# Altium PCB Roverbreakout3.PcbDoc
Units mil, origin at the board's own origin, x right, y up, seen from the top; angles counter-clockwise.
Board outline 1968.5 x 1970 mil, 2 copper layers (Top Layer, Bottom Layer); 29 components, 22 nets, 159 pads, 41 vias.
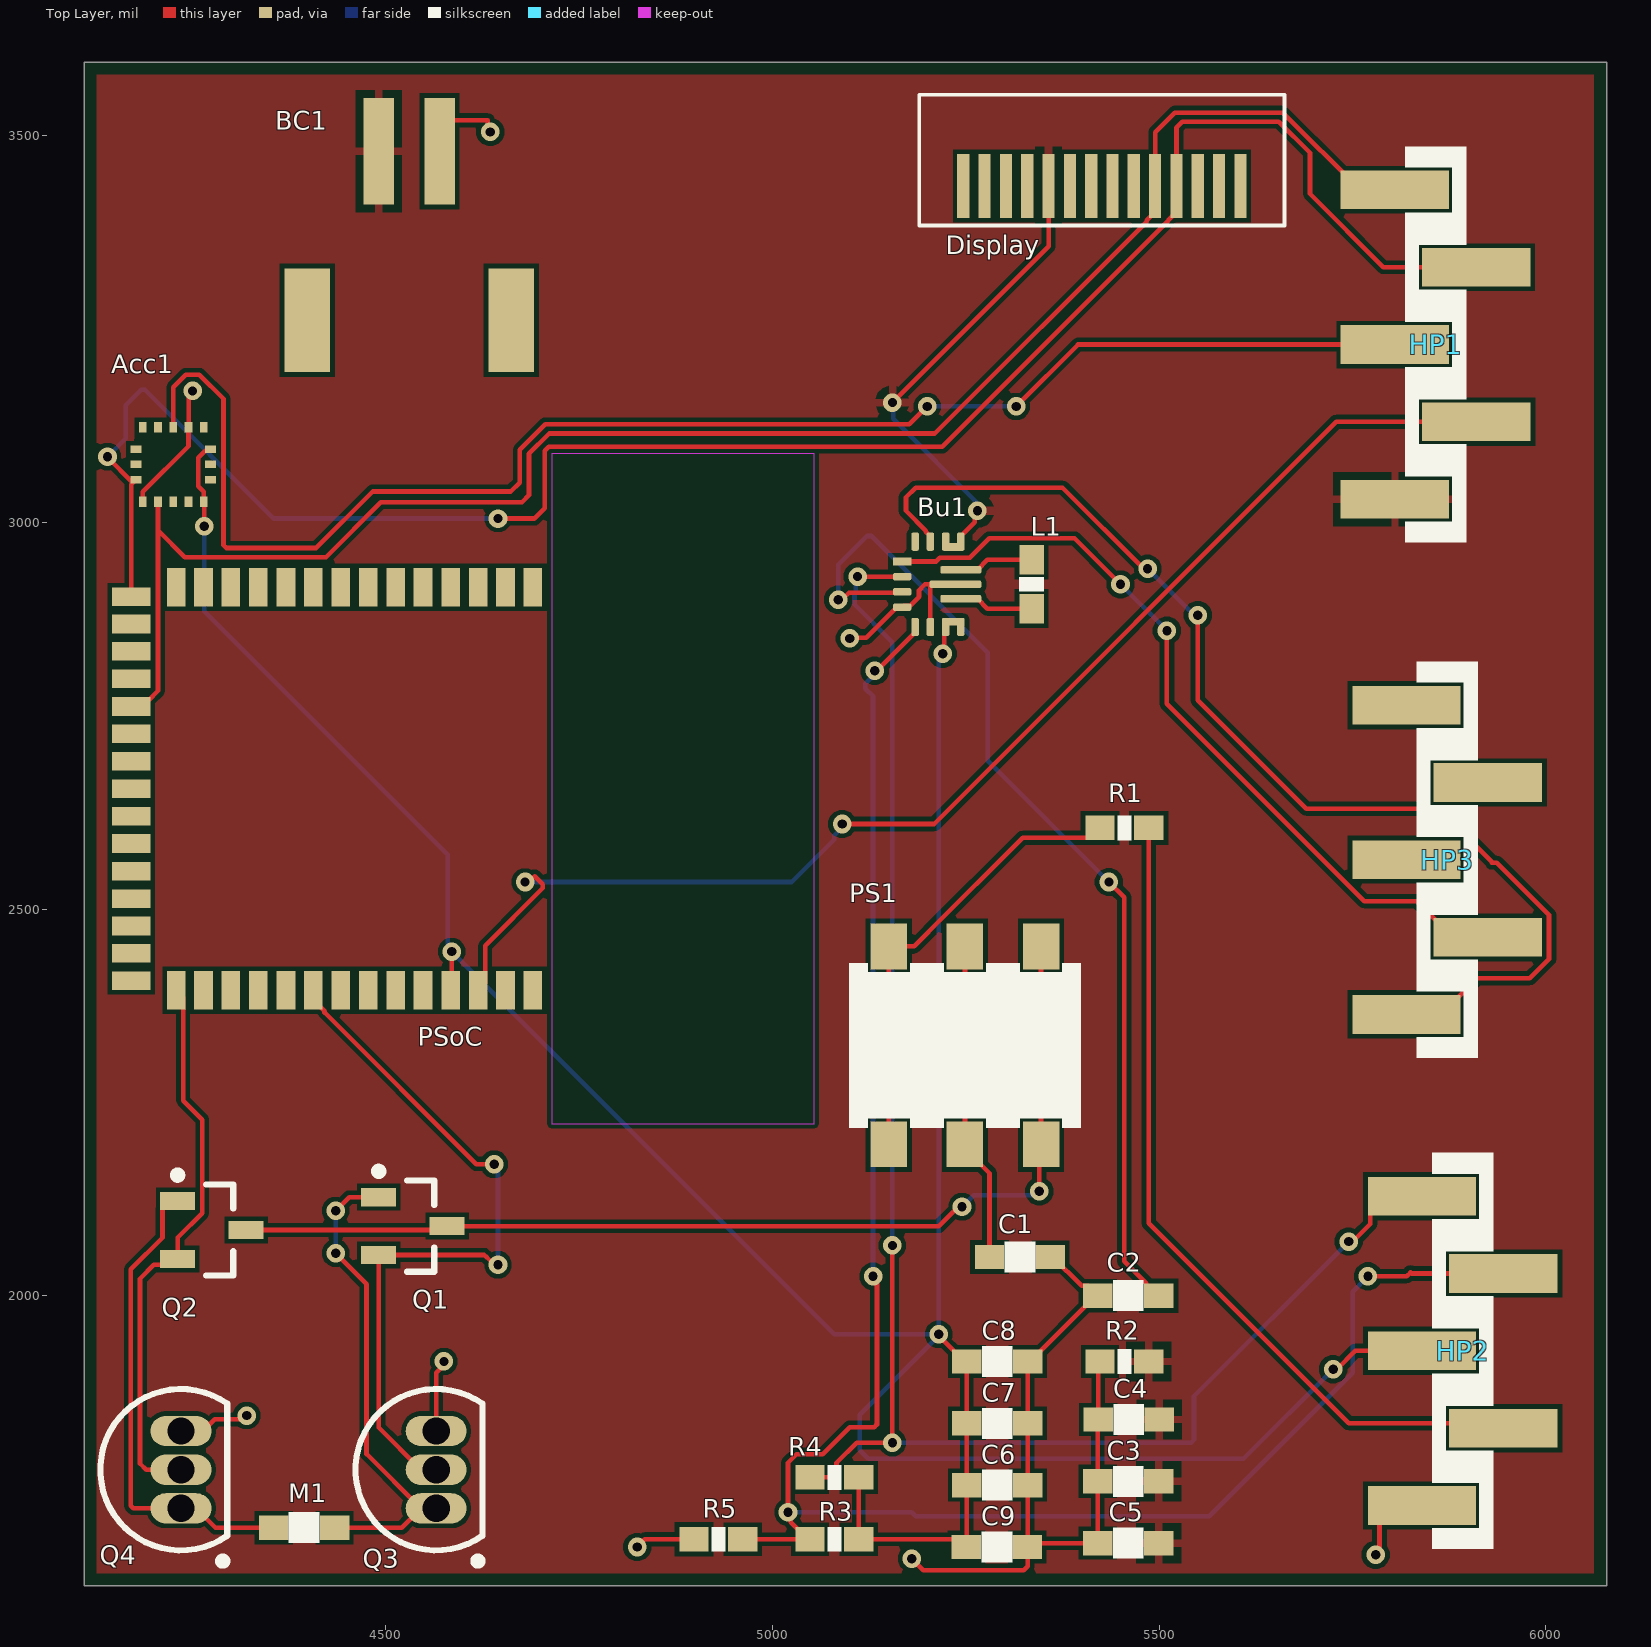
[diagram p0: Top Layer view]
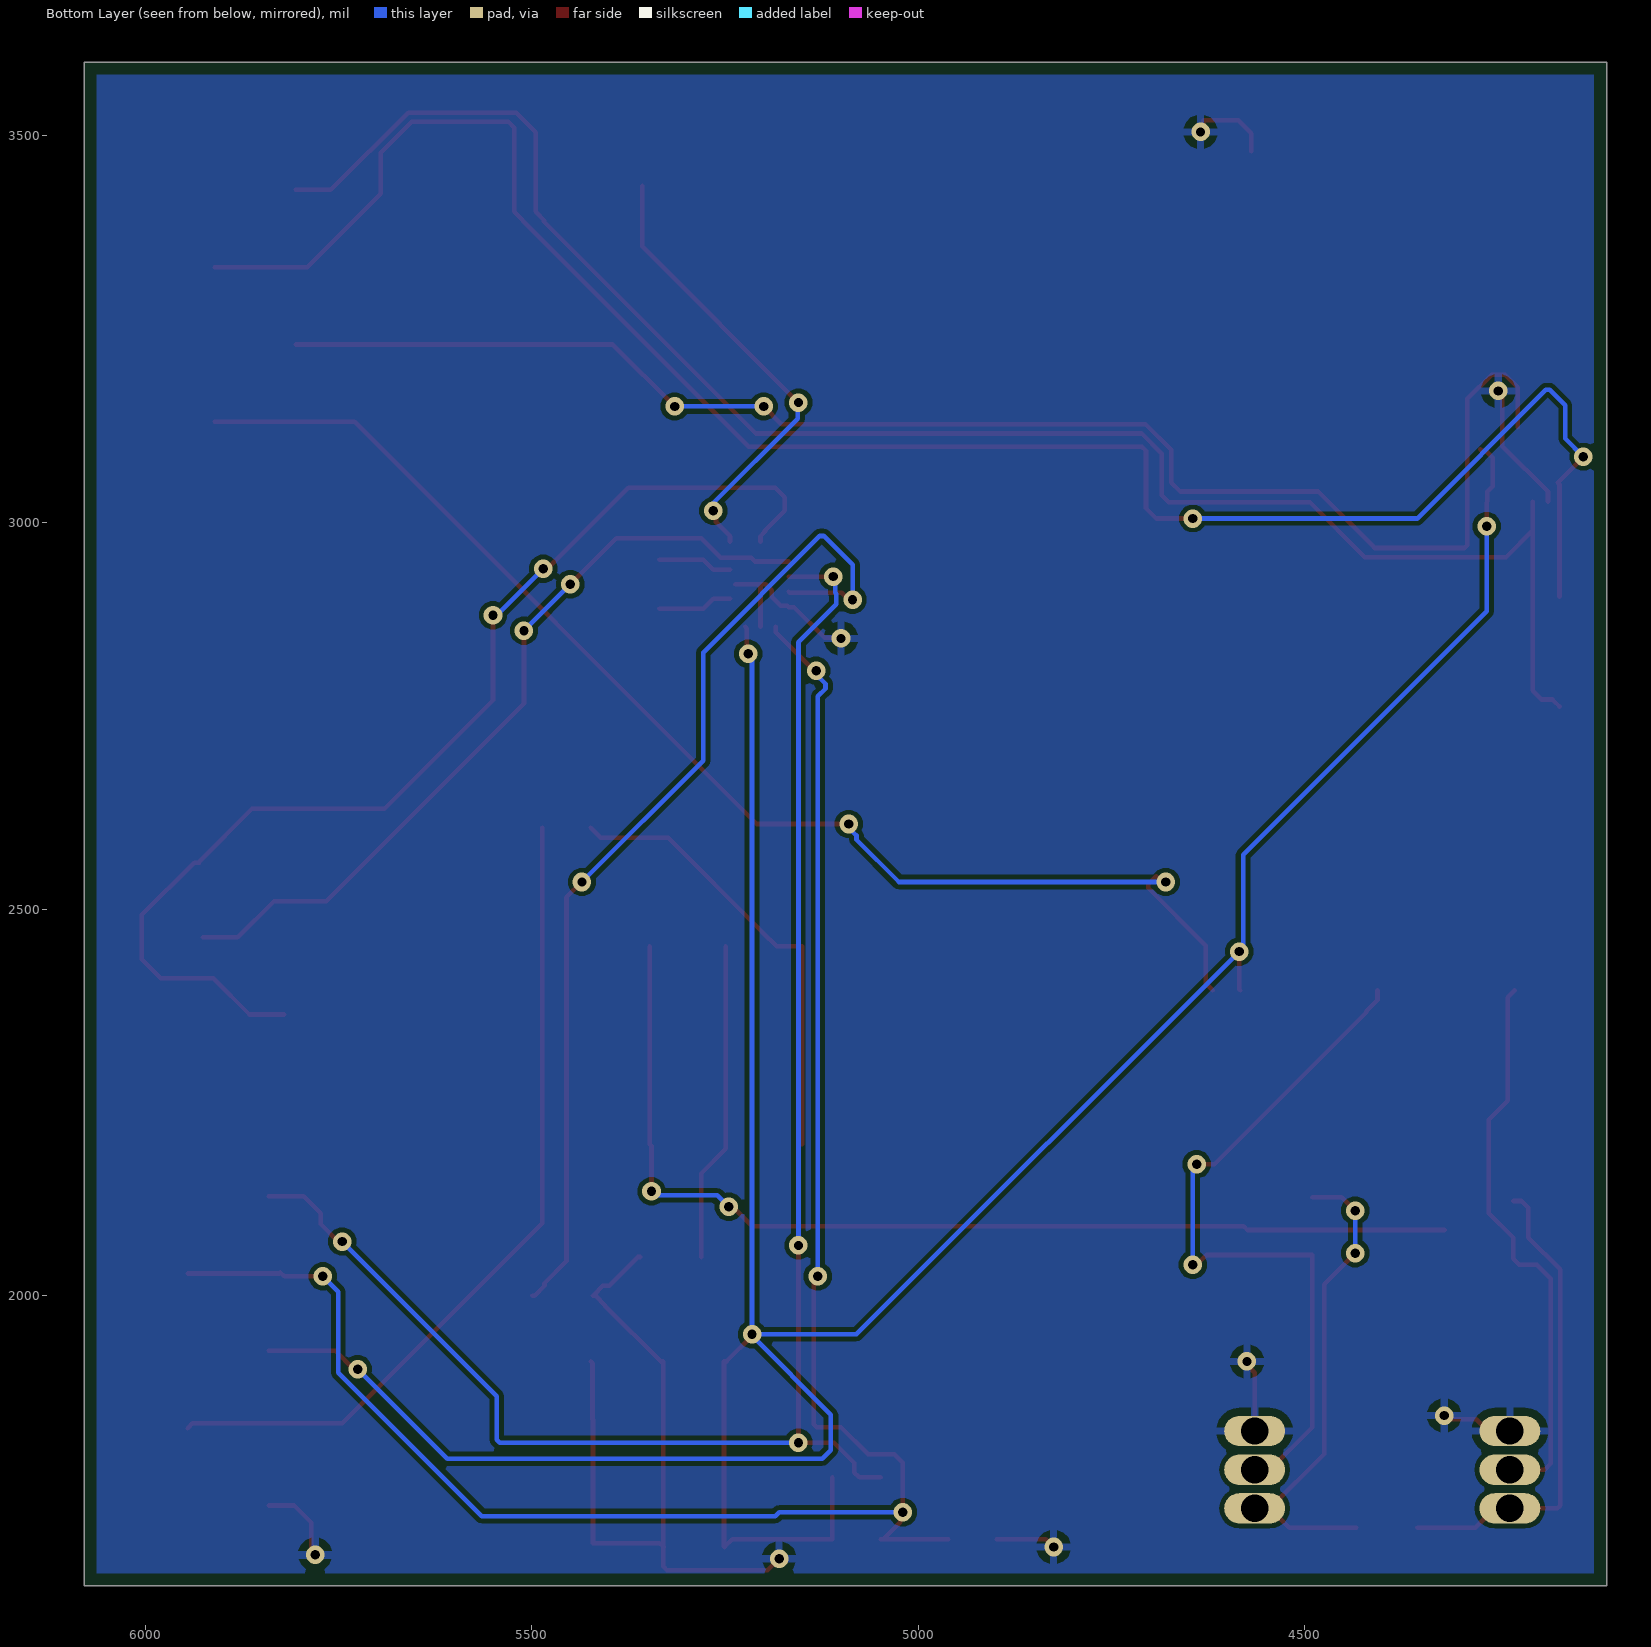
[diagram p1: Bottom Layer view, seen from below]

## Layer stack, top to bottom
Top Solder: solder mask 0.4, Solder Resist, Dk 3.5
Top Layer: signal copper 1.4
Dielectric 1: dielectric 12.6, FR-4, Dk 4.8
Bottom Layer: signal copper 1.4
Bottom Solder: solder mask 0.4, Solder Resist, Dk 3.5

## Board outline
4110,1625 4110,3595 6078.5,3595 6078.5,1625

## Design rules (kind name [scope] priority, off if disabled: settings)
BoardOutlineClearance [All] p1: gap=16 ignorepadtopadclearanceinfootprint=FALSE except(0: Arc-SplitContinuation Track-SplitContinuation SMDPad-SplitContinuation THPad-SplitContinuation Via-SplitContinuation Fill-SplitContinuation Poly-SplitContinuation Region-SplitContinuation Text-SplitContinuation)
Clearance [All] p1: gap=6 ignorepadtopadclearanceinfootprint=FALSE
HoleSize [All] p1: absolutevalues=TRUE maxlimit=245 minlimit=12 maxpercent=80.000 minpercent=20.000
MinimumSolderMaskSliver [All] p1 off: minsoldermaskwidth=10
NetAntennae [All] p1 off: netantennaetolerance=0
PolygonConnect [All] p1: connectstyle=Relief reliefconductorwidth=10 reliefentries=4 polygonreliefangle="90 Angle" airgapwidth=10
RoutingVias [All] p1: holewidth=12 width=24 viastyle="Through Hole" minholewidth=6 minwidth=12 maxholewidth=23.62 maxwidth=47.24
SilkToSilkClearance [All] p1 off: silktosilkclearance=10
SilkToSolderMaskClearance [IsPad] p1 off: minsilkscreentomaskgap=10 clearancetoexposedcopper=TRUE
SolderMaskExpansion [All] p1: expansion=4 istentingtop=FALSE
Width [All] p1: maxlimit=78.74 minlimit=6 preferedwidth=6 minimp=50.000000 maximp=50.000000 favimp=50.000000
25 further rules are at their usual default settings.

## Components (designator, comment, footprint, x,y, rotation, side; value= is the part's Value field where it differs from the comment)
Acc1 "LIS3DH" LIS3DH 4225,3075 r270 top
BC1 "BatteryConnector" BatteryConnector 4530,3480 r0 top
Bu1 "Buck_Boost_Converter" Buck_Boost_Converter 5210,2920 r0 top
C1 "Capacitor1" PASSIVE-CAPACITOR-0603 5320,2050 r180 top value=1F
C2 "Capacitor1" PASSIVE-CAPACITOR-0603 5460,2000 r0 top value=?
C3 "Capacitor1" PASSIVE-CAPACITOR-0603 5460,1760 r0 top value=10uF
C4 "Capacitor1" PASSIVE-CAPACITOR-0603 5460.63,1840 r0 top value=10uF
C5 "Capacitor1" PASSIVE-CAPACITOR-0603 5460,1680 r0 top value=10uF
C6 "Capacitor1" PASSIVE-CAPACITOR-0603 5290.63,1755 r180 top value=10uF
C7 "Capacitor1" PASSIVE-CAPACITOR-0603 5290.63,1835 r180 top value=22uF
C8 "Capacitor1" PASSIVE-CAPACITOR-0603 5290.63,1915 r180 top value=22uF
C9 "Capacitor1" PASSIVE-CAPACITOR-0603 5290,1675 r180 top value=22uF
Display "Display" Display 5424.65,3452.44 r0 top (schematic designator Dis1)
HP1 "Header-Pin" Header_Pin 5855.03,3231.31 r90 top
HP2 "Header-Pin" Header_Pin 5890,1930 r90 top
HP3 "Header-Pin" Header_Pin 5870,2565 r90 top
L1 "Inductor" PASSIVE-INDUCTOR-0603 5335,2920 r270 top value=1.5uH
M1 "Motor" Motor 54079.41,-8252.76 r0 top
PS1 "Switch" "3-Way Switch" 5230,2380 r0 top
PSoC "PSoC 63 BLE" "PSoC-63 BLE" 4884.21,2380.04 r270 top (schematic designator PC1)
Q1 "PNP" SOT-23B_N 4535,2090 r0 top
Q2 "PNP" SOT-23B_N 4275,2085 r0 top
Q3 "NPN" TO-226-AA 4565,1775 r0 top
Q4 "NPN" TO-226-AA 4235,1775 r0 top
R1 "Resistor" PASSIVE-RESISTOR-0603 5455,2605 r180 top value=2.5
R2 "Resistor" PASSIVE-RESISTOR-0603 5455,1915 r180 top value=10k
R3 "Resistor" PASSIVE-RESISTOR-0603 5080,1685 r180 top value=470K
R4 "Resistor" PASSIVE-RESISTOR-0603 5080,1765 r180 top value=100k
R5 "Resistor" PASSIVE-RESISTOR-0603 4930,1685 r180 top value=150K

## Footprints (in the part's own frame and the unit in brackets; to place one, negate y for a bottom-side part, rotate by r counter-clockwise, add the part's x,y. Pads: shape width x height; smd on the part's side, far side on the other; paste and mask are expansions set on the pad)
"3-Way Switch" [mm]
  rect 1.2x1.5 smd: 1(-2.022,-4.679) 1(-2.022,1.821) 2(0.478,-4.679) 2(0.478,1.821) 3(2.978,-4.679) 3(2.978,1.821)
  silkscreen extent -3.32,-4.13 4.28,1.27, body extent -3.4,-5.23 4.3,2.27, height 3.3
BatteryConnector [mm]
  rect 1x3.5 smd: GND(1,0) VBAT(-1,0)
  rect 1.5x3.4 smd: ""(-3.35,-5.55) ""(3.35,-5.55)
  body extent -3.95,-6 3.95,0, height 5.5
Buck_Boost_Converter [mm] "Buck Boost Converter"
  rrect50% 0.25x0.6 smd: EN(-0.15,1.4) FB(-0.65,-1.4) FB2(-0.15,-1.4) VIN(0.35,1.4) VIN(0.85,1.4) VOUT(0.35,-1.4) VOUT(0.85,-1.4) VSEL(-0.65,1.4)
  rrect50% 0.6x0.25 smd: GND(-1.075,-0.75) PG(-1.075,0.25) VAUX(-1.075,-0.25)
  rrect50% 1.35x0.25 smd: L1(0.85,0.475) L2(0.85,-0.475)
  rrect50% 1.7x0.25 smd: PGND(0.675,0)
  rect 0.6x0.25 smd: PS/S(-1.075,0.75)
  rrect50% 0.75x0.25 smd: VIN(0.6,1.225) VOUT(0.6,-1.225)
  body extent -1.07,-1.43 1.28,1.4, height 0.4
Display [mm]
  rect 0.4x2.1 smd: 1(-4.519,-0.443) 2(-3.819,-0.443) 3(-3.119,-0.443) 4(-2.419,-0.443) 5(-1.719,-0.443) 6(-1.019,-0.443) 7(-0.319,-0.443) 8(0.381,-0.443) 9(1.081,-0.443) 10(1.781,-0.443) 11(2.481,-0.443) 12(3.181,-0.443) 13(3.881,-0.443) 14(4.581,-0.443)
  silkscreen extent -5.97,-1.74 6.03,2.56
Header_Pin [mm]
  rect 1.27x3.56 smd: 1(-5.113,1.274) 2(-2.573,-1.396) 3(-0.033,1.274) 4(2.507,-1.396) 5(5.047,1.274)
  silkscreen extent -6.53,-1.06 6.47,0.94, body extent -6.1,-2.62 6.19,2.26, height 9.78
LIS3DH [mm]
  rect 0.25x0.35 smd: ADC1(0.5,1.225) ADC2(0,1.225) CS(-0.5,-1.225) SDA/SDI/SDO(0.5,-1.225) "SDO / SA0"(0,-1.225) VDD(-0.5,1.225)
  rect 0.35x0.25 smd: ADC3(-1.225,1) GND(-1.225,0.5) GND(1.225,-1) INT1(-1.225,0) INT2(-1.225,-1) NC(1.225,0.5) NC(1.225,0) RES(-1.225,-0.5) "SCL / SPC"(1.225,-0.5) VDDIO(1.225,1)
  body extent -1.5,-1.5 1.5,1.5, height 1
Motor [mm]
  rect 0.965x0.8 smd: 1(-1263,252.8) 2(-1261,252.8)
  silkscreen extent -1262.5,252.3 -1261.5,253.3
PASSIVE-CAPACITOR-0603 [mm]
  rect 0.965x0.8 smd: 1(-1,0) 2(1,0)
  silkscreen extent -0.5,-0.5 0.5,0.5
PASSIVE-INDUCTOR-0603 [mm] "Inductor"
  rect 0.965x0.8 smd: 1(-0.8,0) 2(0.8,0)
  silkscreen extent -0.23,-0.4 0.23,0.4, body extent -0.82,-0.4 0.8,0.4, height 0.4
PASSIVE-RESISTOR-0603 [mm]
  rect 0.965x0.8 smd: 1(-0.8,0) 2(0.8,0)
  silkscreen extent -0.23,-0.4 0.23,0.4, body extent -0.82,-0.4 0.8,0.4, height 0.4
"PSoC-63 BLE" [mm]
  rect 1.27x0.61 smd: 1(-0.38,-4.93) 2(-0.38,-5.83) 3(-0.38,-6.73) 4(-0.38,-7.63) 5(-0.38,-8.54) 6(-0.38,-9.44) 7(-0.38,-10.34) 8(-0.38,-11.24) 9(-0.38,-12.14) 10(-0.38,-13.04) 11(-0.38,-13.95) 12(-0.38,-14.85) 13(-0.38,-15.75) 14(-0.38,-16.65) 30(-13.62,-16.65) 31(-13.62,-15.75) 32(-13.62,-14.85) 33(-13.62,-13.95) 34(-13.62,-13.04) 35(-13.62,-12.14) 36(-13.62,-11.24) 37(-13.62,-10.34) 38(-13.62,-9.44) 39(-13.62,-8.54) 40(-13.62,-7.63) 41(-13.62,-6.73) 42(-13.62,-5.83) 43(-13.62,-4.93)
  rect 0.61x1.27 smd: 15(-0.69,-18.12) 16(-1.59,-18.12) 17(-2.49,-18.12) 18(-3.39,-18.12) 19(-4.29,-18.12) 20(-5.2,-18.12) 21(-6.1,-18.12) 22(-7,-18.12) 23(-7.9,-18.12) 24(-8.8,-18.12) 25(-9.7,-18.12) 26(-10.61,-18.12) 27(-11.51,-18.12) 28(-12.41,-18.12) 29(-13.31,-18.12)
  Top Layer keep-out region: -18,-4.31 4,-4.31 4,4.31 -18,4.31
  body extent -14,-18.5 0,0, height 1.2
SOT-23B_N [mm] "SOT23, 3-Leads, Body 2.9x1.3mm, Pitch 0.95mm, Lead Span 2.4mm, IPC Medium Density"
  rect 1.15x0.6 smd: 1(-1.125,0.95) 2(-1.125,-0.95) 3(1.125,0)
  silkscreen extent -1.25,-1.5 0.7,1.92, body extent -0.7,-1.5 0.7,1.5, height 1.14
TO-226-AA [mm] "TO, Flat Index; 3 In-Line, Axial Leads; Body Dia. 4.8mm; Leads 0.55 x 0.51 mm (max)"
  oval 2x1 hole 0.9: 1(0,-1.27) 2(0,0) 3(0,1.27)
  silkscreen extent -2.65,-3.13 1.52,2.65, body extent -2.65,-2.66 1.52,2.66, height 5.33

## Part data
Q1 Q2: "PNP Bipolar Transistor", LatestRevisionDate=29-May-2009, LatestRevisionNote="IPC-7351 Footprint Added.", PackageDescription="3-Pin SOT-23 Package 0.95 mm Pitch, 2.4 mm Lead Span", PackageReference=SOT-23B, PackageVersion=Aug-1999, Published=8-Jun-2000, Publisher="Altium Limited"
Q3 Q4: "NPN Bipolar Transistor", Code_JEDEC=TO-226-AA, LatestRevisionDate=17-Jul-2002, LatestRevisionNote="Re-released for DXP Platform.", PackageDescription="TO, Flat Index; 3 In-Line, Axial Leads; Body Dia. 4.8mm; Leads 0.55 x 0.51 mm (max)", PackageReference=TO-226-AA, Published=8-Jun-2000, Publisher="Altium Limited"
R1 R2 R3 R4 R5: library part Resistor1

## Via types
v1: diameter 24, hole 12, Top Layer to Bottom Layer, 41 vias

## Nets (pads, with @x,y where several pads share a name; then routed paths per layer and width w, separated by ;. In a path a pad name is that pad's centre, name@x,y a point inside that pad or via, vN(x,y) a via of type N, cw(c..) or ccw(c..) an arc to the next point about the centre after c; other vN are vias at no path point)
EN: Bu1.EN HP3.1 | length 1472.4
  Top Layer w6: Bu1.EN 5204.09,2982.01 5198.33,2987.77 5198.33,2989.22 5172.55,3015 5172.55,3032.55 5185,3045 5375,3045 5480,2940 v1(5485,2940) ; v1(5550,2880) 5550,2770 5690.31,2629.69 5861.66,2629.69 5930,2561.35 5930,2560 5936.47,2560 6004.05,2492.42 6004.05,2434.97 5979.41,2410.33 5911.57,2410.33 5864.93,2363.69 HP3.1
  Bottom Layer w6: v1(5485,2940) 5540,2885 5540.13,2885 5545.13,2880 v1(5550,2880)
FB: Bu1.FB HP2.4 R3.2 R5.1 | length 2517.9
  Top Layer w6: R5.1 R3.2@5045.26,1685 ; R3.2 R3.2@5045.26,1685 ; v1(5130,2025) 5131.49,2025 5135,2021.49 5135,1833.51 5131.49,1830 5100,1830 5065,1795 5031.03,1795 5020,1783.97 v1(5020,1720) 5023.44,1716.56 5023.44,1706.81 R3.2@5045.26,1685 ; v1(5132.15,2808.15) 5134.57,2808.15 5184.41,2857.99 Bu1.FB ; v1(5770,2025) 5820,2025 5825,2030 5826.31,2028.69 HP2.4
  Bottom Layer w6: v1(5020,1720) 5180,1720 5185,1715 5564.7,1715 5750.13,1900.43 5750.13,2005.13 v1(5770,2025) ; v1(5130,2025) 5130,2775 5120,2785 5120,2791.13 5132.15,2803.28 v1(5132.15,2808.15)
GND: Acc1.GND BC1.GND Bu1.FB2 Bu1.GND Bu1.PGND C1.1 C2.1 C3.1 C4.1 C5.1 C6.1 C7.1 C8.1 C9.1 HP2.1 Q3.3 Q4.3 R2.2 R5.2 | length 1841.5
  Top Layer w6: Acc1.GND@4185.63,3026.77 4185.63,3039.63 4244.69,3098.69 4244.69,3123.23 4245,3123.54 4245,3166.49 4248.51,3170 v1(4250,3170) ; Q4.3 4263.71,1825 4278.71,1840 4316.49,1840 4320,1843.51 v1(4320,1845) ; Q3.3 4565,1900.13 4575,1910.13 v1(4575,1915) ; BC1.GND 4569.37,3503.31 4586.06,3520 4631.49,3520 4631.56,3519.93 4631.56,3508.44 v1(4635,3505) ; v1(4825,1675) 4835,1685 R5.2 ; v1(5100,2850) 5100.69,2850.69 5121,2850.69 5160.79,2890.47 Bu1.GND 5169.6,2892.39 5177.93,2892.39 5189.49,2903.95 5189.49,2912.28 5197.2,2920 Bu1.PGND@5208.03,2920 ; v1(5180,1660) 5195,1645 5325,1645 5330,1650 C9.1@5330,1675.63 ; Bu1.FB2 5204.09,2916.06 Bu1.PGND@5208.03,2920 ; Bu1.PGND Bu1.PGND@5208.03,2920 ; C9.1 C9.1@5330,1675.63 ; C1.1 5362.62,2050 5399.87,2012.75 5407.88,2012.75 C2.1 5417.38,2000 5404.63,1987.25 5404.63,1986.39 5333.25,1915 C8.1 C7.1 C6.1 C9.1@5330,1675.63 ; R2.2 5421.26,1912.76 C4.1 5420.63,1839.37 C3.1 C5.1 5334.37,1680 C9.1@5330,1675.63 ; v1(5780,1665) 5780,1669.87 5785,1674.87 5785,1706.69 5807,1728.69 HP2.1
INT1: Acc1.INT1 HP1.3 | length 1975.4
  Top Layer w6: Acc1.INT1 4225,3174.7 4241.3,3191 4258.7,3191 4290,3159.7 4290,2970.51 4293.51,2967 4410,2967 4483,3040 4661.49,3040 4673,3051.51 4673,3093.84 4706.16,3127 5177,3127 v1(5200,3150) ; v1(5315,3150) 5395,3230 HP1.3
  Bottom Layer w6: v1(5200,3150) v1(5315,3150)
NetBu1_L1: Bu1.L1 L1.1 | length 96.8
  Top Layer w6: Bu1.L1 5265.12,2938.7 5277.91,2951.5 L1.1
NetBu1_L2: Bu1.L2 L1.2 | length 96.8
  Top Layer w6: Bu1.L2 5265.12,2901.3 5277.91,2888.5 L1.2
NetBu1_VAUX: Bu1.VAUX C2.2 | length 1328.4
  Top Layer w6: v1(5085,2900) 5089.87,2900 5098.87,2909 5166.52,2909 Bu1.VAUX ; v1(5435,2535) 5455,2515 5455,2044.37 5483.37,2016 5483.37,2012.75 5496.12,2000 C2.2
  Bottom Layer w6: v1(5085,2900) 5085,2945 5122.51,2982.51 5127.49,2982.51 5278.28,2831.72 5278.28,2691.72 v1(5435,2535)
NetC1_2: C1.2 PS1.2 | length 414.9
  Top Layer w6: PS1.2@5248.8,2451.69 5248.8,2195.78 5248.8,2189.87 5280.63,2158.05 C1.2
NetM1_1: M1.1 Q2.1 Q4.1 | length 622.2
  Top Layer w6: Q2.1 4219.88,2122.4 4211.07,2113.59 4211.07,2075.14 4170,2034.07 4170,1728.51 4173.51,1725 Q4.1 4254.69,1725 4279.69,1700 M1.1
NetM1_2: M1.2 Q1.1 Q3.1 | length 635.2
  Top Layer w6: M1.2 4520.31,1700 Q3.1@4545.31,1725 ; v1(4435,2055) 4475,2015 4475,1795.32 Q3.1@4545.31,1725 ; v1(4435,2110) 4452.4,2127.4 Q1.1 ; Q3.1 Q3.1@4545.31,1725
  Bottom Layer w6: v1(4435,2055) v1(4435,2110)
NetPS1_1: PS1.1 R1.2 | length 592.6
  Top Layer w6: PS1.1@5150.38,2195.78 5150.38,2451.69 5183,2451.69 5202.23,2470.91 5202.23,2470.99 5323.49,2592.25 5410.76,2592.25 R1.2
NetPS1_3: PS1.3 Q1.3 Q2.3 | length 1364
  Top Layer w6: Q2.3 4574.29,2085 Q1.3 5215,2090 5240.01,2115.01 v1(5245,2115) ; v1(5345,2135) 5345,2193.55 5347.23,2195.78 PS1.3@5347.23,2451.69
  Bottom Layer w6: v1(5245,2115) 5260,2130 5340,2130 v1(5345,2135)
PG: Bu1.PG HP2.5 R4.2 | length 2190.3
  Top Layer w6: R4.2 5076.5,1765 5082.64,1771.14 5082.64,1783.61 5109.02,1810 v1(5155,1810) v1(5155,2065) ; v1(5110,2930) 5110.08,2929.92 5167.6,2929.92 Bu1.PG ; v1(5745,2070) 5749.99,2069.99 5772.77,2092.77 5772.77,2106.69 5794.77,2128.69 HP2.5
  Bottom Layer w6: v1(5110,2930) 5107.44,2927.44 5107.44,2909 5106,2907.56 5106,2894 5155,2845 v1(5155,2065) ; v1(5155,1810) 5541.49,1810 5545,1813.51 5545,1870 v1(5745,2070)
PS/S: Bu1.PS/S HP3.2 | length 1039.4
  Top Layer w6: Bu1.PS/S 5211.51,2949.53 5216.29,2954.31 5255.28,2954.31 5280.46,2979.49 5390.51,2979.49 v1(5450,2920) ; v1(5510,2860) 5510,2765.74 5765.41,2510.33 5833.25,2510.33 5879.89,2463.69 HP3.2
  Bottom Layer w6: v1(5450,2920) 5505,2865 5506.49,2865 5510,2861.49 v1(5510,2860)
SCL: "Acc1.SCL / SPC" Display.10 HP1.5 PSoC.25 | length 2273.9
  Top Layer w6: PSoC.25 4179.83,2770.94 4193.74,2770.94 4205.31,2782.51 4205.31,2989.68 ; 4205.31,3026.77 4205.31,2989.68 ; HP1.5 5759.8,3430 5659.8,3530 5520,3530 5494.76,3504.76 Display.10 5494.76,3401.54 5484.08,3390.85 5484.08,3389.08 5210,3115 4711.13,3115 4685,3088.87 4685,3035 4676,3026 4493.5,3026 4422.5,2955 4240,2955 4205.31,2989.68
SDA: Acc1.SDA/SDI/SDO Display.11 HP1.4 PSoC.29 | length 2524.3
  Top Layer w6: v1(4140,3085) 4140,3084.31 4172.88,3051.43 4170.83,3049.37 PSoC.29 ; v1(4645,3005) 4692.01,3005 4705.53,3018.51 4705.53,3092.43 4710.8,3097.7 5219.41,3097.7 5511.64,3389.93 5511.64,3390.85 5522.32,3401.54 Display.11 5522.32,3510.32 5530,3518 5654.83,3518 5695,3477.83 5695,3425 5790,3330 HP1.4
  Bottom Layer w6: v1(4140,3085) 4163.48,3108.48 4163.48,3151.48 4183.51,3171.51 4188.49,3171.51 4355,3005 v1(4645,3005)
Vb1: PSoC.14 Q2.2 Q4.2 | length 729.1
  Top Layer w6: PSoC.14 4237.71,2385.99 4237.71,2252.25 4262.35,2227.61 4262.35,2106.86 4230.71,2075.22 Q2.2 4223.11,2040 4200,2040 4182,2022 4182,1783 4190,1775 Q4.2
Vb2: PSoC.9 Q1.2 Q3.2 | length 946.8
  Top Layer w6: PSoC.9 4406.26,2382.01 4420.69,2367.58 4420.69,2366.27 4616.96,2170 v1(4640,2170) ; Q3.2 4545.31,1775 4490.71,1829.61 Q1.2 4627.4,2052.6 4629.98,2050.02 4630.11,2050.02 4640.13,2040 v1(4645,2040)
  Bottom Layer w6: v1(4640,2170) 4640,2165.13 4645,2160.13 v1(4645,2040)
Vbackup: HP1.2 PSoC.3 | length 1684.3
  Top Layer w6: PSoC.3 4628.26,2404.01 4628.26,2452.73 4702.78,2527.25 4702.78,2532.22 4692.49,2542.51 4692.39,2542.51 4684.87,2535 v1(4680,2535) ; v1(5090,2610) 5208.9,2610 5728.9,3130 HP1.2
  Bottom Layer w6: v1(4680,2535) 5025,2535 5080,2590 5080,2595.13 5090,2605.13 v1(5090,2610)
Vbat: BC1.VBAT Bu1.VIN C3.2 C4.2 C5.2 Display.5 HP1.1 R2.1 | length 600.1
  Top Layer w6: v1(5155,3155) 5356.97,3356.97 Display.5 ; Bu1.VIN@5243.46,2975.12 5243.46,2982.01 5261.56,3000.1 5261.56,3011.56 v1(5265,3015)
  Bottom Layer w6: v1(5155,3155) 5156,3154 5156,3134 5267.51,3022.49 5267.51,3017.51 v1(5265,3015)
Vout1: Acc1.VDD Acc1.VDDIO Bu1.VOUT C6.2 C7.2 C8.2 C9.2 HP2.3 PSoC.4 R3.1 R4.1 | length 4097.6
  Top Layer w6: v1(4265,2995) 4265,3026.14 Acc1.VDDIO 4264.37,3039.63 4257.34,3046.67 4257.34,3083.65 4266.45,3092.76 4271.31,3092.76 Acc1.VDD ; PSoC.4 4585,2396.18 v1(4585,2445) ; R4.1 R3.1 5240.63,1685 C9.2 5251.26,1675.63 C6.2 C7.2 C8.2 5248.01,1915 5215,1948.01 v1(5215,1950) ; v1(5220,2830) 5221.89,2831.89 5221.89,2862.99 Bu1.VOUT@5223.78,2864.88 ; v1(5725,1905) 5730,1905 5753.69,1928.69 HP2.3
  Bottom Layer w6: v1(4265,2995) 4265,2885 4580,2570 4580,2448.51 4583.51,2445 v1(4585,2445) 5080,1950 v1(5215,1950) ; v1(5220,2830) 5218.51,2830 5215,2826.49 v1(5215,1950) ; v1(5725,1905) 5609,1789 5124.03,1789 5113,1800.03 5113,1846.03 5215,1948.03 v1(5215,1950)
Vsolar: HP2.2 R1.1 | length 1079.7
  Top Layer w6: R1.1 5486.5,2093.5 5745,1835 5938.66,1835 HP2.2
pads on no net: "Acc1.SDO / SA0" Acc1.ADC1 Acc1.ADC2 Acc1.ADC3 Acc1.CS Acc1.INT2 Acc1.NC Acc1.RES BC1. Bu1.VSEL Display.1 Display.2 Display.3 Display.4 Display.6 Display.7 Display.8 Display.9 Display.12 Display.13 Display.14 HP3.3 HP3.4 HP3.5 PSoC.1 PSoC.2 PSoC.5 PSoC.6 PSoC.7 PSoC.8 PSoC.10 PSoC.11 PSoC.12 PSoC.13 PSoC.15 PSoC.16 PSoC.17 PSoC.18 PSoC.19 PSoC.20 PSoC.21 PSoC.22 PSoC.23 PSoC.24 PSoC.26 PSoC.27 PSoC.28 PSoC.30 PSoC.31 PSoC.32 PSoC.33 PSoC.34 PSoC.35 PSoC.36 PSoC.37 PSoC.38 PSoC.39 PSoC.40 PSoC.41 PSoC.42 PSoC.43

## Polygon pours and split planes (outlines as drawn)
GND on Bottom Layer "NONET_L-01_P-001" (solid, pour order 0): 4110,3595 6075,3595 6075,1625 4110,1625
Vbat on Top Layer "NONET_L-01_P-001" (solid, pour order 1): 4110,3590 4115,3595 6075,3595 6075,1625 4110,1625

## Silkscreen, mask and mechanical layers (free items; w line width, h text height)
Board outline:
  lines w10: 4110,3593.5 4110,1625 6075,1625 ; 4110,3595 6078.5,3595 6078.5,1625